# EAGLE board VgaCrystalDiode (EAGLE 5.10)
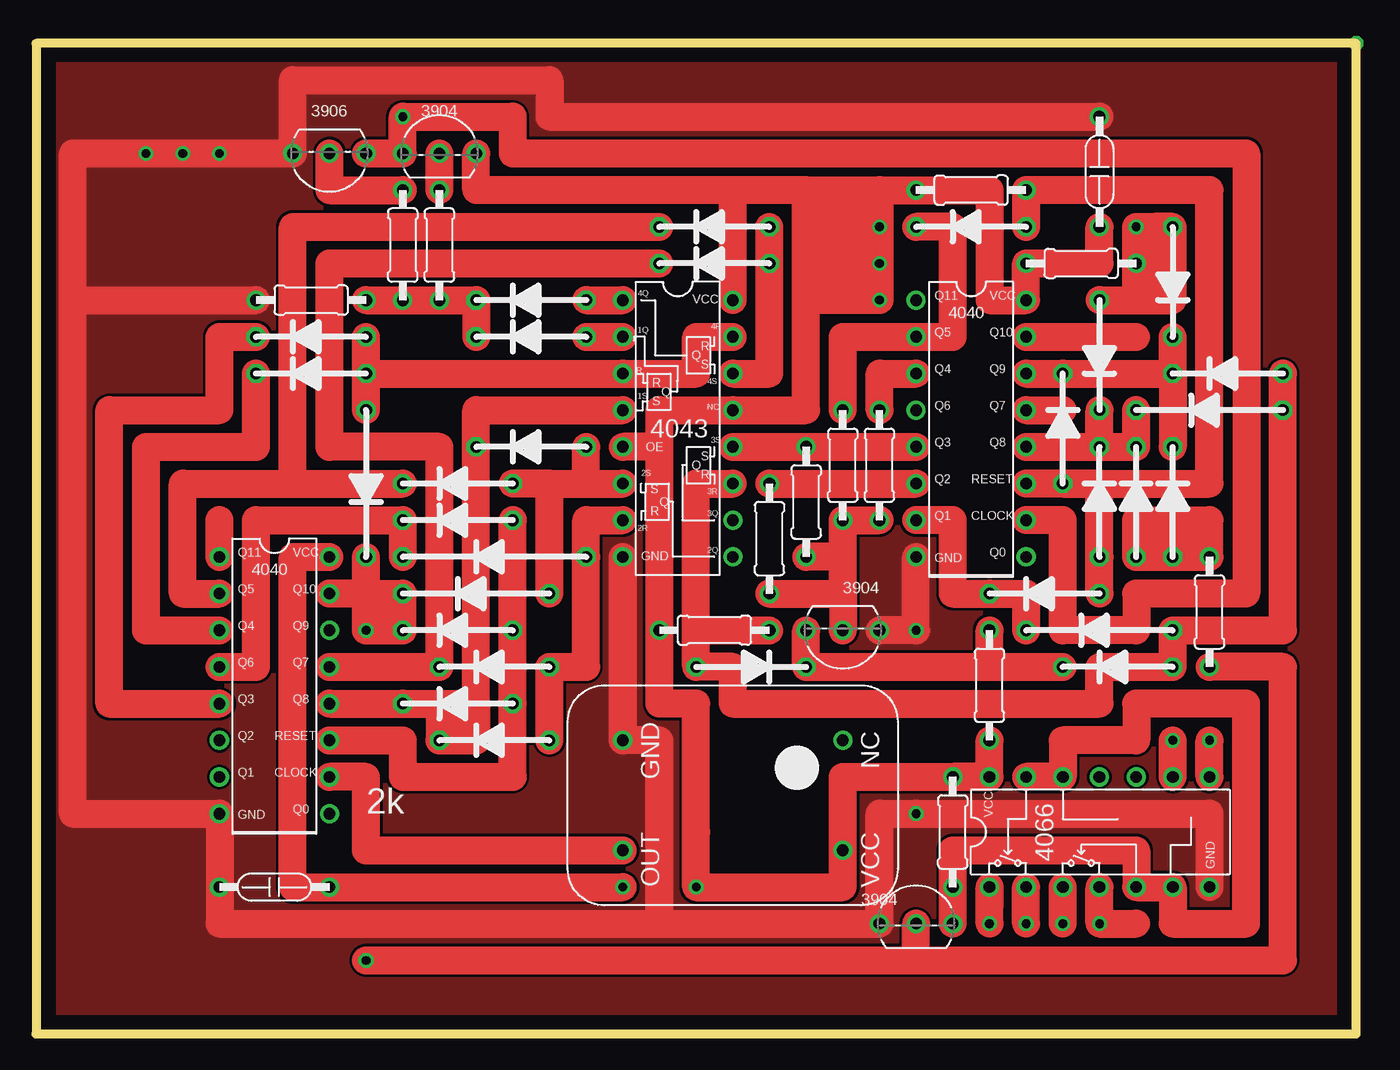
[diagram p0: board, top side]
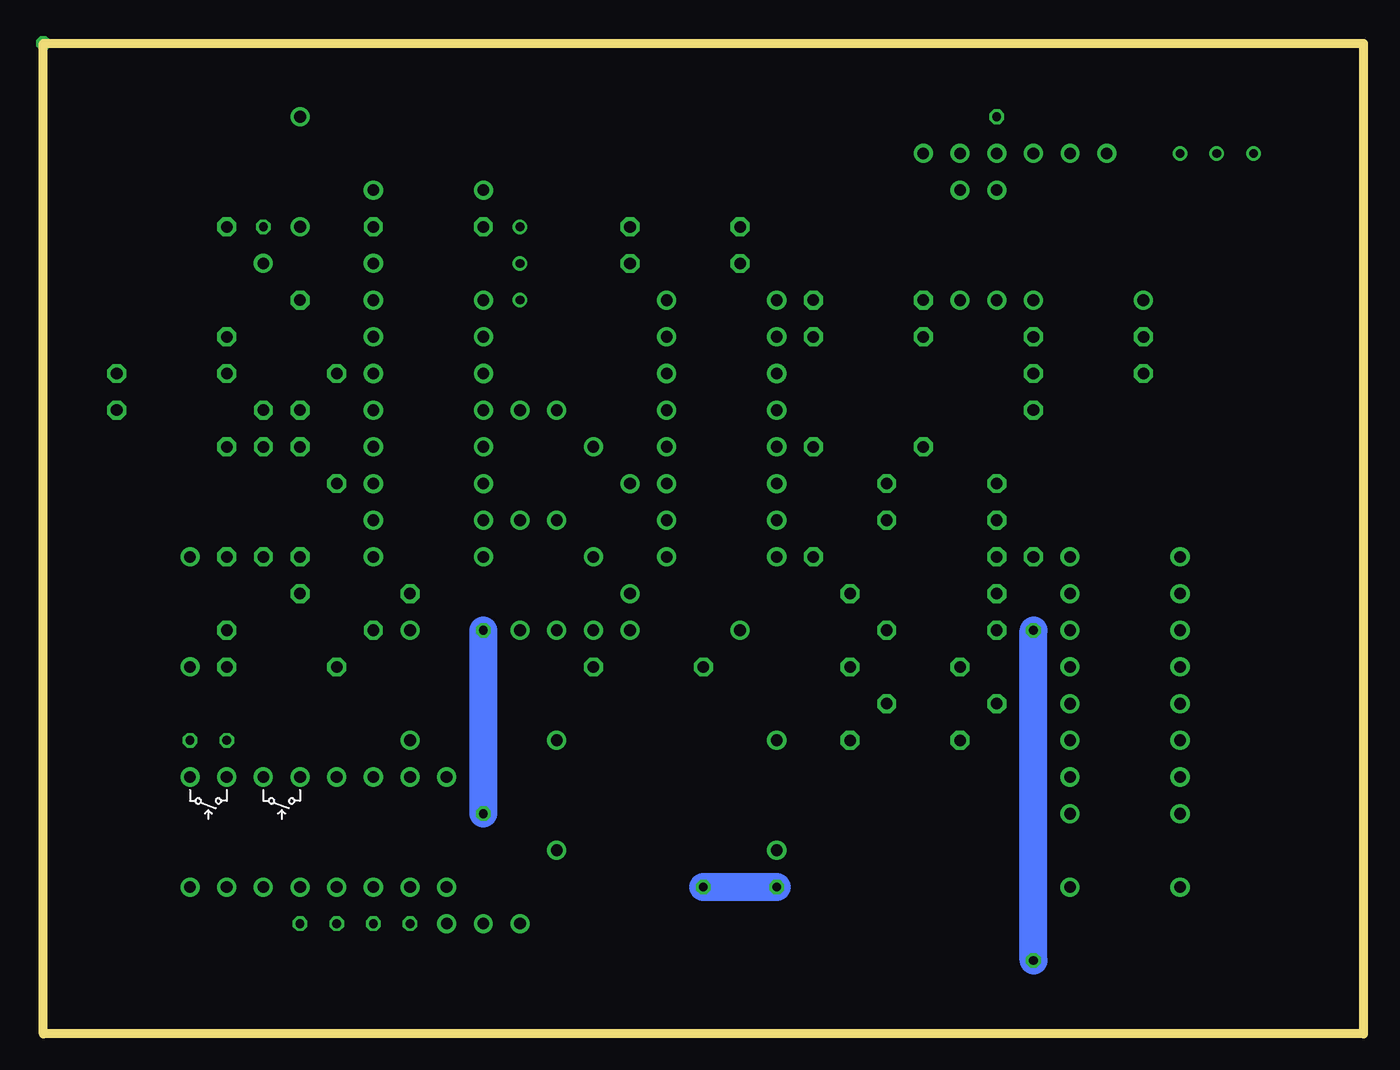
[diagram p1: board, bottom side, seen from below]

Size 91.44 x 68.58 mm. Coordinates in mm from the lower left corner, seen from the top.
Outline: 91.44,0 91.44,68.58 0,68.58 0,0 91.44,0
Copper layers (1*16): Top 0.035mm / dielectric 1.5mm / Bottom 0.035mm
Design rules "default": minimum track width 10mil, minimum drill 24mil, track to track 8mil, track to pad 8mil, pad to pad 8mil, via to via 8mil, smd to smd 8mil, copper to edge 40mil, drill to drill 8mil, minimum pad ring 10mil, minimum via ring 8mil, stop-mask expansion 4mil, vias tented up to drill 0mil, thermal gap 10mil

## Footprints (pad centres in the part's own frame; a part is rotated, then mirrored left to right if it is on the bottom)
4043-SR-LATCH = drill 0.813 round: 1!R -3.81,1.27; 1!S -3.81,3.81; 1Q 3.81,1.27; 2!R -3.81,-3.81; 2!S -3.81,-6.35; 2Q 3.81,-8.89; 3!R 3.81,-1.27; 3!S 3.81,-3.81; 3Q 3.81,-6.35; 4!R 3.81,3.81; 4!S 3.81,6.35; 4Q -3.81,8.89; GND -3.81,-8.89; NC -3.81,6.35; OE -3.81,-1.27; VCC 3.81,8.89
DIODE = drill 0.8 octagon: P$1 -3.81,0; P$2 3.81,0
DIODE-L2 = drill 0.8 octagon: P$1 -5.08,0; P$2 5.08,0
404-BIN-COUNT = drill 0.813 round: CLOCK 3.81,-7.62; GND -3.81,-10.16; Q0 3.81,-10.16; Q1 -3.81,-7.62; Q2 -3.81,-5.08; Q3 -3.81,-2.54; Q4 -3.81,2.54; Q5 -3.81,5.08; Q6 -3.81,0; Q7 3.81,0; Q8 3.81,-2.54; Q9 3.81,2.54; Q10 3.81,5.08; Q11 -3.81,7.62; RESET 3.81,-5.08; VCC 3.81,7.62
711A-XTAL = drill 0.813 round: GND -3.81,-8.89; NC -3.81,6.35; OUT 3.81,-8.89; VCC 3.81,6.35
4066-QUAD-SW = drill 0.813 round: A1 -3.81,7.62; A2 -3.81,2.54; A3 3.81,-5.08; A4 3.81,0; B1 -3.81,5.08; B2 -3.81,0; B3 3.81,-7.62; B4 3.81,-2.54; C1 3.81,5.08; C2 -3.81,-2.54; C3 -3.81,-5.08; C4 3.81,2.54; GND -3.81,-7.62; VCC 3.81,7.62
RESISTOR = drill 0.813 round: IN1 -3.81,0; IN2 3.81,0
TRANSISTOR = drill 0.8 round: P$1 0,0; P$2 2.54,0; P$3 -2.54,0
DIODE-L3 = drill 0.8 octagon: P$1 -6.35,0; P$2 6.35,0
CAPACITOR = drill 0.813 round: IN1 -2.54,0; IN2 5.08,0

## Placement (x,y rotation side)
E$1  [4043-SR-LATCH]  44.45,41.91 0 top
E$2  [DIODE]  46.99,53.34 180 top
E$3  [DIODE]  29.21,22.86 180 top
E$4  [DIODE-L2]  81.28,43.18 180 top
E$5  [404-BIN-COUNT]  16.51,25.4 0 top
E$6  [711A-XTAL]  49.53,16.51 270 top
E$7  [4066-QUAD-SW]  73.66,13.97 90 top
E$8  [DIODE]  78.74,36.83 90 top
E$9  [DIODE]  29.21,27.94 180 top
E$10  2K  [RESISTOR]  81.28,29.21 270 top
E$11  [DIODE]  29.21,35.56 180 top
E$12  [DIODE]  31.75,20.32 180 top
E$13  [DIODE]  31.75,25.4 180 top
E$14  [DIODE]  34.29,48.26 180 top
E$15  [DIODE]  46.99,55.88 180 top
E$16  [TRANSISTOR]  60.96,7.62 0 top
E$17  [DIODE-L2]  22.86,38.1 270 top
E$18  [DIODE]  29.21,38.1 180 top
E$19  [DIODE]  34.29,40.64 180 top
E$20  2K  [RESISTOR]  64.77,58.42 0 top
E$21  [DIODE-L2]  30.48,30.48 180 top
E$22  [DIODE]  34.29,50.8 180 top
E$23  10K  [RESISTOR]  46.99,27.94 0 top
E$25  [DIODE]  19.05,45.72 180 top
E$26  [DIODE]  19.05,48.26 180 top
E$27  [404-BIN-COUNT]  64.77,43.18 0 top
E$28  [DIODE]  73.66,36.83 90 top
E$29  [DIODE]  71.12,41.91 90 top
E$30  [DIODE]  69.85,30.48 180 top
E$31  [DIODE]  64.77,55.88 180 top
E$33  [DIODE]  73.66,46.99 270 top
E$34  [DIODE]  78.74,52.07 270 top
E$35  2K  [RESISTOR]  25.4,54.61 90 top
E$36  2K  [RESISTOR]  27.94,54.61 90 top
E$37  [DIODE-L3]  31.75,33.02 180 top
E$38  [TRANSISTOR]  20.32,60.96 180 top
E$39  10K  [RESISTOR]  19.05,50.8 180 top
E$40  [DIODE]  76.2,36.83 90 top
E$41  2K  [RESISTOR]  72.39,53.34 180 top
E$42  2K  [RESISTOR]  63.5,13.97 270 top
E$43  2K  [RESISTOR]  66.04,24.13 270 top
E$44  1UF  [CAPACITOR]  73.66,58.42 90 top
E$45  1UF  [CAPACITOR]  15.24,10.16 0 top
E$46  [DIODE]  74.93,25.4 180 top
E$47  [DIODE]  82.55,45.72 180 top
E$48  [TRANSISTOR]  27.94,60.96 0 top
E$50  [DIODE-L2]  73.66,27.94 180 top
E$51  [TRANSISTOR]  55.88,27.94 180 top
E$52  2K  [RESISTOR]  58.42,39.37 270 top
E$54  2K  [RESISTOR]  55.88,39.37 270 top
E$56  [DIODE]  49.53,25.4 0 top
E$57  2K  [RESISTOR]  53.34,36.83 270 top
E$58  2K  [RESISTOR]  50.8,34.29 270 top

## Library data of the parts
E$1-E$23 E$25-E$31 E$33-E$48 E$50-E$52 E$54 E$56-E$58 = RussellLibrary

## Nets
GND: E$1.GND E$5.GND E$6.GND E$7.GND E$16.P$3 E$27.GND E$39.IN2 E$44.IN2 E$51.P$3
S$1: E$5.CLOCK E$6.OUT
S$2: E$5.Q11
S$3: E$3.P$1 E$5.RESET E$11.P$1
S$4: E$1.1!R E$3.P$2 E$5.Q8 E$12.P$2
S$5: E$8.P$1 E$10.IN1 E$40.P$1
S$6: E$5.Q5 E$15.P$2 E$18.P$2
S$7: E$1.1Q E$1.OE E$5.VCC E$6.VCC E$7.VCC E$27.VCC E$41.IN2 E$43.IN2 E$44.IN1
S$8: E$1.2!S E$12.P$1 E$13.P$1
S$9: E$1.2!R E$18.P$1 E$19.P$1
S$10: E$5.Q4 E$25.P$2
S$11: E$1.1!S E$1.4!S E$26.P$1
S$12: E$1.4!R E$2.P$1 E$15.P$1
S$13: E$2.P$2 E$5.Q7 E$13.P$2
S$14: E$1.4Q E$22.P$1
S$15: E$1.NC E$14.P$1
S$16: E$27.CLOCK
S$17: E$5.Q3 E$26.P$2
S$18: E$1.3!S E$23.IN2
S$19: E$27.Q4 E$52.IN1
S$20: E$8.P$2 E$27.Q9 E$29.P$2 E$34.P$2
S$21: E$27.Q8 E$28.P$2 E$33.P$2 E$40.P$2
S$22: E$1.3!R
S$23: E$20.IN2 E$27.RESET E$28.P$1 E$29.P$1 E$30.P$1 E$31.P$1
S$24: E$35.IN2
S$26: E$14.P$2 E$22.P$2 E$35.IN1 E$36.IN1 E$39.IN1
S$27: E$36.IN2
S$28: E$27.Q2 E$58.IN1
S$29: E$27.Q1 E$30.P$2 E$50.P$2
S$30: E$27.Q5 E$31.P$2 E$54.IN1
S$31: E$27.Q10
S$32: E$5.Q10 E$10.IN2 E$16.P$1 E$21.P$2
S$33: E$7.C1 E$7.C2 E$7.C3 E$7.C4 E$16.P$2
S$34: E$27.Q7
S$35: E$33.P$1 E$34.P$1 E$41.IN1
S$36: E$1.VCC
S$37: E$43.IN1 E$46.P$2 E$51.P$2
S$38: E$51.P$1 E$52.IN2 E$54.IN2 E$57.IN2 E$58.IN2
S$40: E$7.A1
S$43: E$7.A3
S$44: E$7.B3
S$45: E$7.B1
S$46: E$7.A2
S$47: E$7.B2
S$52: E$5.Q6 E$11.P$2

## Tracks (layer width: path | path; a pad name or v marks a point on that pad's centre or on a via)
GND  (via drill 0.6)
  Top 1.93: E$27.GND v60.96,27.94 E$51.P$3 | E$7.GND 81.28,15.24 v60.96,15.24 58.42,15.24 E$16.P$3 43.18,7.62 | E$44.IN2 35.56,63.5 35.56,66.04 17.78,66.04 17.78,60.96 v12.7,60.96 v10.16,60.96 v7.62,60.96 2.54,60.96 2.54,50.8 | E$1.GND E$6.GND 43.18,20.32 43.18,7.62 | 43.18,7.62 12.7,7.62 E$5.GND 2.54,15.24 2.54,50.8 | 2.54,50.8 E$39.IN2
  Bottom 1.93: v60.96,15.24 v60.96,27.94
  pour Top: 1.27,1.27 1.27,68.58 91.44,68.58 91.44,1.27
S$1
  Top 1.93: E$5.CLOCK 22.86,17.78 22.86,12.7 E$6.OUT
S$2
  Top 1.93: E$5.Q11 12.7,35.56
S$3
  Top 1.93: E$5.RESET 25.4,20.32 25.4,17.78 33.02,17.78 E$3.P$1 E$11.P$1
S$4
  Top 1.93: 30.48,21.59 29.21,21.59 | 30.48,21.59 30.48,20.32 E$12.P$2 27.94,22.86 E$3.P$2 | 30.48,22.86 30.48,43.18 E$1.1!R | 30.48,22.86 30.48,21.59 | E$3.P$2 30.48,22.86 | E$5.Q8 E$3.P$2
S$5
  Top 1.93: 80.01,33.02 E$8.P$1 E$40.P$1 76.2,34.29 | 80.01,33.02 E$10.IN1 81.28,35.56 76.2,35.56 76.2,34.29 | 76.2,34.29 80.01,34.29 80.01,33.02
S$6
  Top 1.93: 17.78,38.1 10.16,38.1 10.16,30.48 E$5.Q5 | 17.78,38.1 E$18.P$2 | 17.78,38.1 17.78,55.88 E$15.P$2
S$7  (via drill 0.6)
  Top 1.93: E$44.IN1 73.66,53.34 E$41.IN2 E$27.VCC 66.04,50.8 66.04,58.42 58.42,58.42 | 30.48,60.96 30.48,58.42 53.34,58.42 | 53.34,58.42 58.42,58.42 | E$7.VCC 63.5,17.78 | E$7.VCC E$43.IN2 | 43.18,40.64 43.18,43.18 E$1.1Q 53.34,43.18 53.34,50.8 | 43.18,40.64 E$1.OE | E$7.VCC 55.88,17.78 E$6.VCC 55.88,10.16 v45.72,10.16 | 43.18,40.64 43.18,22.86 45.72,22.86 v45.72,10.16 | v45.72,10.16 45.72,13.97 | E$5.VCC 17.78,33.02 17.78,10.16 v40.64,10.16 | 53.34,52.07 53.34,58.42 | 58.42,58.42 58.42,50.8 53.34,50.8 | 53.34,50.8 53.34,52.07 | 53.34,52.07 57.15,52.07 57.15,57.15 54.61,57.15 54.61,53.34 55.88,53.34 55.88,55.88
  Bottom 1.93: v40.64,10.16 v45.72,10.16
S$8
  Top 1.93: E$1.2!S 38.1,35.56 38.1,33.02 38.1,25.4 E$13.P$1 E$12.P$1
S$9
  Top 1.93: 35.56,38.1 38.1,38.1 | 38.1,38.1 E$1.2!R | 35.56,38.1 E$18.P$1 | 35.56,30.48 35.56,38.1 | 38.1,38.1 E$19.P$1
S$10
  Top 1.93: E$5.Q4 7.62,27.94 7.62,40.64 15.24,40.64 E$25.P$2
S$11
  Top 1.93: 22.86,45.72 E$1.1!S 45.72,45.72 45.72,48.26 E$1.4!S | 22.86,45.72 E$26.P$1 | 22.86,43.18 22.86,45.72
S$12
  Top 1.93: E$1.4!R 50.8,45.72 E$2.P$1 E$15.P$1
S$13
  Top 1.93: E$5.Q7 E$13.P$2 27.94,40.64 20.32,40.64 20.32,53.34 E$2.P$2
S$14
  Top 1.93: E$22.P$1 E$1.4Q
S$15
  Top 1.93: E$14.P$1 E$1.NC
S$16  (via drill 0.6)
  Top 1.93: 22.86,60.96 25.4,60.96 v25.4,63.5 33.02,63.5 33.02,60.96 83.82,60.96 83.82,30.48 76.2,30.48 76.2,27.94 71.12,27.94 71.12,35.56 E$27.CLOCK
S$17
  Top 1.93: E$26.P$2 12.7,48.26 12.7,43.18 5.08,43.18 5.08,22.86 E$5.Q3
S$18
  Top 1.93: 86.36,45.72 86.36,27.94 78.74,27.94 78.74,25.4 73.66,25.4 73.66,22.86 48.26,22.86 48.26,25.4 45.72,25.4 45.72,27.94 | 45.72,27.94 45.72,38.1 E$1.3!S | 45.72,27.94 E$23.IN2
S$19
  Top 1.93: E$52.IN1 58.42,45.72 E$27.Q4
S$20
  Top 1.93: 78.74,45.72 E$8.P$2 | 78.74,45.72 E$34.P$2 | 78.74,45.72 E$29.P$2 E$27.Q9
S$21
  Top 1.93: E$27.Q8 E$28.P$2 | 76.2,43.18 E$40.P$2 E$28.P$2 | E$28.P$2 E$33.P$2
S$22
  Top 1.93: E$1.3!R 60.96,40.64
S$23
  Top 1.93: E$29.P$1 81.28,38.1 81.28,58.42 E$20.IN2 E$31.P$1 | E$29.P$1 73.66,38.1 E$28.P$1 E$30.P$1 | E$29.P$1 E$27.RESET
S$24
  Top 1.93: E$35.IN2 20.32,58.42 20.32,60.96
S$25  (via drill 0.6)
  other vias: 91.44,68.58
S$26
  Top 1.93: E$14.P$2 E$22.P$2 E$36.IN1 E$35.IN1 E$39.IN1
S$27
  Top 1.93: E$36.IN2 27.94,60.96
S$28
  Top 1.93: E$58.IN1 E$27.Q2
S$29
  Top 1.93: E$50.P$2 68.58,30.48 E$30.P$2 63.5,30.48 63.5,35.56 E$27.Q1
S$30
  Top 1.93: E$54.IN1 55.88,44.45 55.88,45.72 55.88,48.26 E$27.Q5 63.5,48.26 63.5,55.88 E$31.P$2
S$31
  Top 1.93: E$27.Q10 76.2,48.26
S$32  (via drill 0.6)
  Top 1.93: E$10.IN2 86.36,25.4 86.36,5.08 60.96,5.08 | 22.86,30.48 E$5.Q10 | v22.86,27.94 22.86,30.48 | v22.86,5.08 60.96,5.08 | 60.96,5.08 E$16.P$1 | v22.86,27.94 24.13,27.94 24.13,29.21 | v22.86,27.94 25.4,27.94 E$21.P$2 22.86,30.48 | 22.86,30.48 22.86,33.02
  Bottom 1.93: v22.86,5.08 v22.86,27.94
S$33
  Top 1.93: E$16.P$2 63.5,12.7 76.2,12.7 E$7.C2 E$7.C3 78.74,7.62 83.82,7.62 83.82,22.86 76.2,22.86 76.2,20.32 71.12,20.32 E$7.C4 E$7.C1
S$34
  Top 1.93: E$27.Q7 71.12,43.18
S$35  (via drill 0.6)
  Top 1.93: E$33.P$1 76.2,50.8 | 76.2,50.8 E$41.IN1 v76.2,55.88 77.47,55.88 | 76.2,50.8 78.74,50.8 E$34.P$1 77.47,55.88 | 77.47,55.88 77.47,52.07
S$36
  Top 1.93: E$1.VCC 48.26,58.42
S$37
  Top 1.93: 66.04,25.4 53.34,25.4 E$51.P$2 | 66.04,25.4 E$43.IN1 | 66.04,25.4 E$46.P$2
S$38
  Top 1.93: E$52.IN2 E$54.IN2 55.88,33.02 | 55.88,30.48 55.88,33.02 | 55.88,30.48 E$51.P$1 | E$58.IN2 55.88,30.48 | 55.88,33.02 E$57.IN2
S$40  (via drill 0.6)
  Top 1.93: v66.04,7.62 E$7.A1 66.04,8.89
S$41  (via drill 0.6)
  other vias: 58.42,55.88
S$42  (via drill 0.6)
  other vias: 58.42,53.34
S$43  (via drill 0.6)
  Top 1.93: E$7.A3 v78.74,20.32
S$44  (via drill 0.6)
  Top 1.93: E$7.B3 v81.28,20.32
S$45  (via drill 0.6)
  Top 1.93: v68.58,7.62 E$7.B1
S$46  (via drill 0.6)
  Top 1.93: v71.12,7.62 E$7.A2
S$47  (via drill 0.6)
  Top 1.93: v73.66,7.62 E$7.B2
S$48
  Top 1.93: 73.66,7.62 76.2,7.62
S$49  (via drill 0.6)
  other vias: 58.42,50.8
S$52
  Top 1.93: 25.4,33.02 E$11.P$2 15.24,35.56 15.24,25.4 E$5.Q6

## Text on the board
Unrouted: HSYNC | VST | PROBLEM | x | GOOD
tPlace: 3906 | 3904 | 3904 | 2k | 3904